# EAGLE board class a (EAGLE 9.6.2)
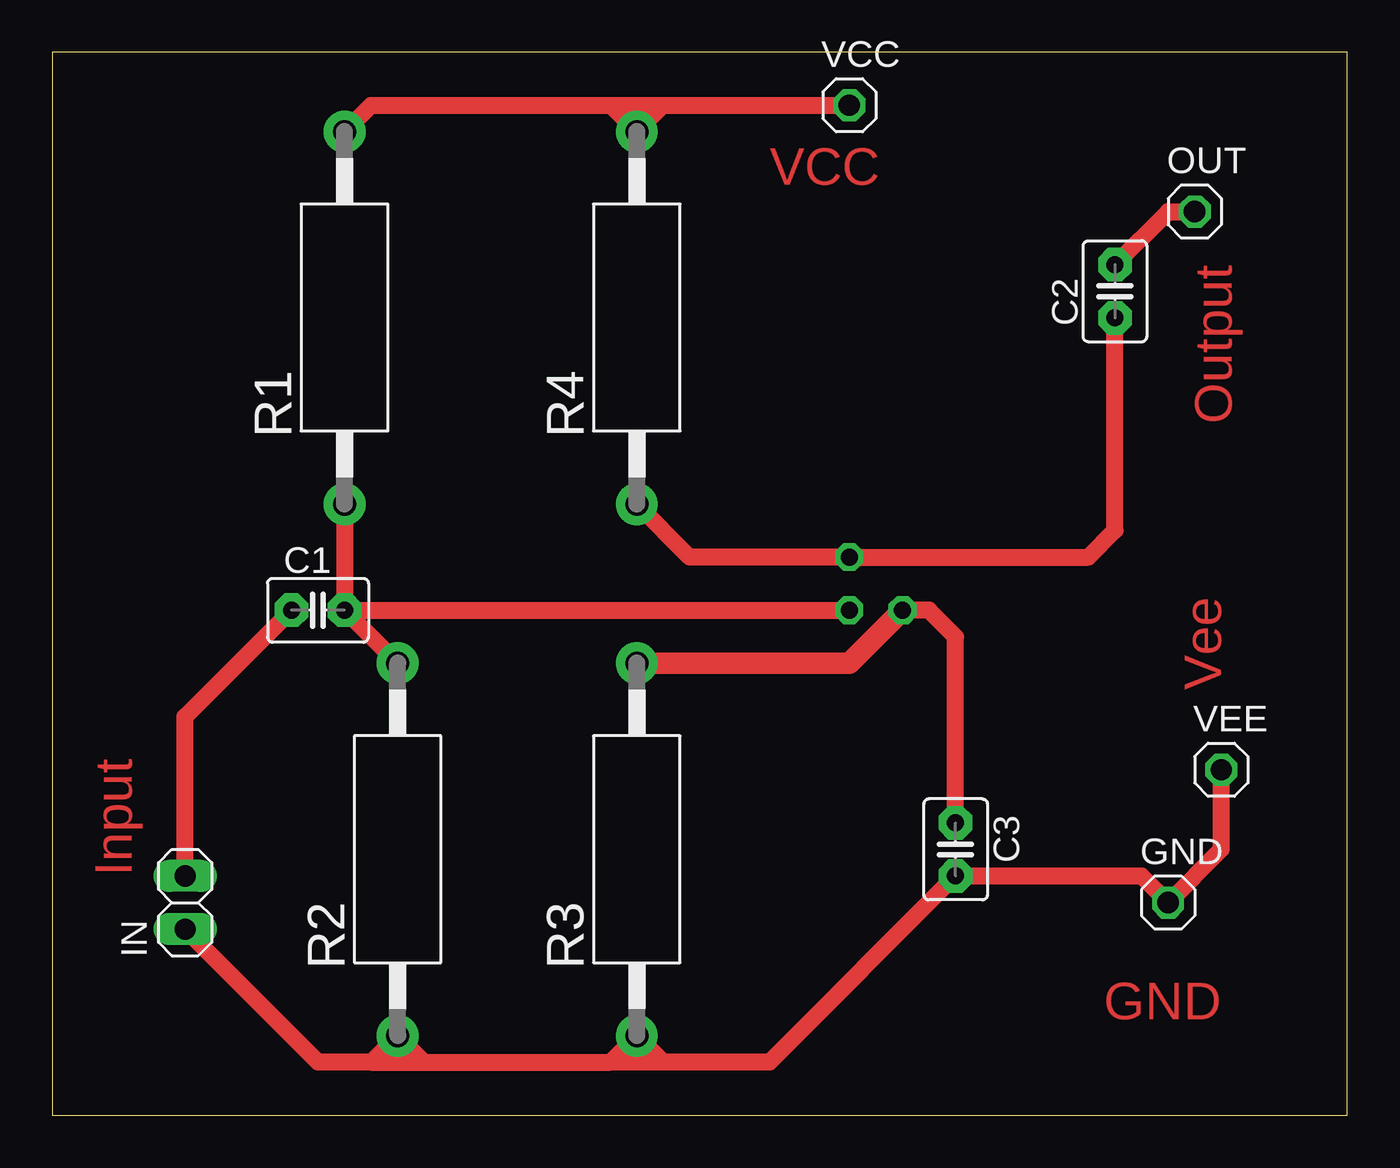
[diagram p0: board, top side]
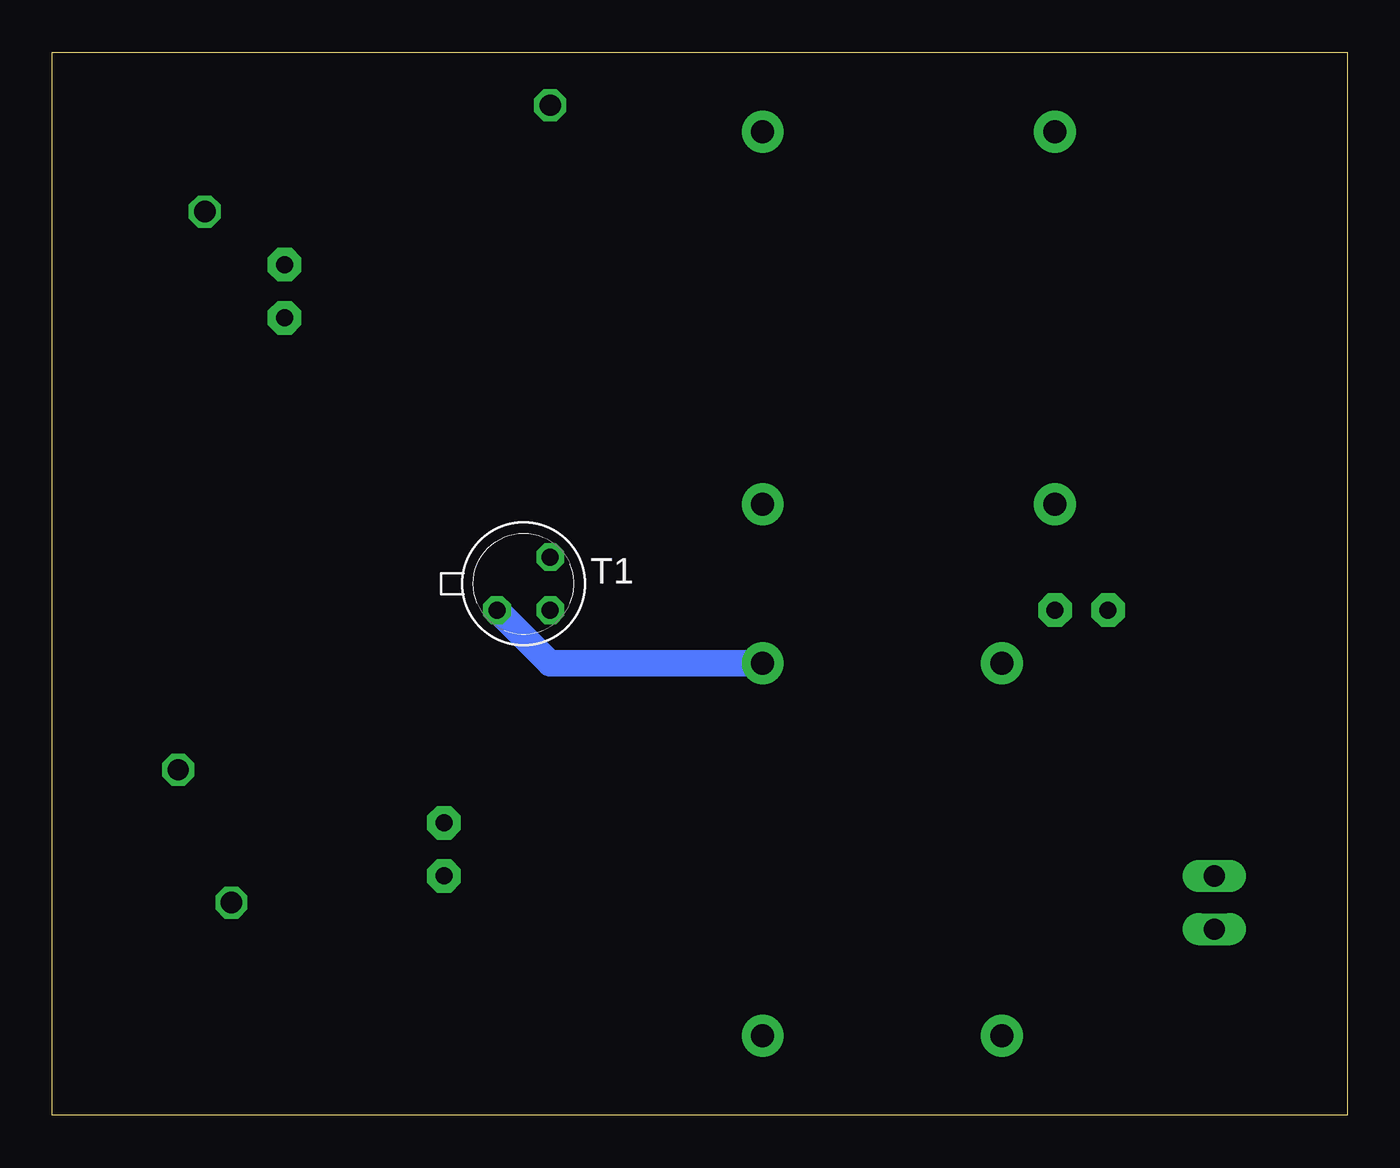
[diagram p1: board, bottom side, seen from below]

Size 61.9 x 50.79 mm. Coordinates in mm from the lower left corner, seen from the top.
Outline: 0,0 61.9,0 61.9,50.79 0,50.79 0,0
Copper layers (1*16): Top 0.035mm / dielectric 1.5mm / Bottom 0.035mm
Design rules "default": minimum track width 6mil, minimum drill 0.35mm, track to track 6mil, track to pad 6mil, pad to pad 6mil, via to via 6mil, smd to smd 6mil, copper to edge 40mil, drill to drill 6mil, minimum pad ring 10mil, minimum via ring 8mil, stop-mask expansion 4mil, vias tented up to drill 0mil, thermal gap 10mil

## Footprints (pad centres in the part's own frame; a part is rotated, then mirrored left to right if it is on the bottom)
C2.5-3 = drill 0.813 pad 1.6 octagon: 1 -1.27,0; 2 1.27,0
1X01 = drill 1.016 octagon: 1 0,0
1X02 = drill 1.016 long: 1 -1.27,0; 2 1.27,0
AC01 = drill 1.1 pad 2: 1 -8.9,0; 2 8.9,0
TO18 = drill 0.813 octagon: 1 -1.27,-1.27; 2 1.27,-1.27; 3 1.27,1.27

## Placement (x,y rotation side)
C1  [C2.5-3]  12.7,24.13 0 top
C2  [C2.5-3]  50.8,39.37 90 top
C3  [C2.5-3]  43.18,12.7 270 top
GND  [1X01]  53.34,10.16 0 top
IN  [1X02]  6.35,10.16 90 top
OUT  [1X01]  54.61,43.18 0 top
R1  [AC01]  13.97,38.1 90 top
R2  [AC01]  16.51,12.7 90 top
R3  [AC01]  27.94,12.7 90 top
R4  [AC01]  27.94,38.1 90 top
T1  2N2222  [TO18]  39.37,25.4 0 bottom
VCC  [1X01]  38.1,48.26 0 top
VEE  [1X01]  55.88,16.51 0 top

## Library data of the parts
C1-C3 = capacitor-wima
GND IN OUT VCC VEE = pinhead
R1-R4 = resistor-power; OC_FARNELL: unknown; OC_NEWARK: unknown
T1 = transistor

## Nets
N$1: C1.2 R1.1 R2.2 T1.2
N$2: C2.1 R4.1 T1.3
N$3: C1.1 IN.2
N$5: C3.1 R3.2 T1.1
N$7: C2.2 OUT.1
VCC: R1.2 R4.2 VCC.1
VEE: C3.2 GND.1 IN.1 R2.1 R3.1 VEE.1

## Tracks (layer width: path | path; a pad name or v marks a point on that pad's centre or on a via)
N$1
  Top 0.813: C1.2 R2.2 | C1.2 T1.2 | R1.1 C1.2
N$2
  Top 0.813: R4.1 30.47,26.67 T1.3 49.53,26.67 50.8,27.94 C2.1
N$3
  Top 0.813: IN.2 6.35,19.05 C1.1
N$5
  Top 0.813: C3.1 43.18,22.86 41.91,24.13 T1.1
  Top 1.016: T1.1 38.1,21.59 R3.2 | R3.2 | R3.2
  Bottom 1.27: R3.2 38.11,21.6 T1.1
N$7
  Top 0.813: C2.2 53.34,43.18 OUT.1
VCC
  Top 0.813: R1.2 15.23,48.26 26.68,48.26 | 26.68,48.26 R4.2 29.2,48.26 | 29.2,48.26 30.48,48.26 VCC.1 | 26.68,48.26 29.2,48.26
VEE
  Top 0.813: 17.77,2.54 R2.1 15.25,2.54 | 26.68,2.54 R3.1 29.21,2.54 | 17.77,2.54 26.68,2.54 | 29.21,2.54 34.29,2.54 C3.2 52.07,11.43 GND.1 55.88,12.7 VEE.1 | 29.21,2.54 26.68,2.54 | IN.1 12.7,2.54 15.25,2.54 | 15.25,2.54 17.77,2.54

## Text on the board
Top: VCC | Output | Vee | Input | GND